# Altium PCB Float_Power_PCB.PcbDoc
Units mm, origin at the board's own origin, x right, y up, seen from the top; angles counter-clockwise.
Board outline 108 x 35 mm, 2 copper layers (Top Layer, Bottom Layer); 13 components, 15 nets, 58 pads, 3 vias.
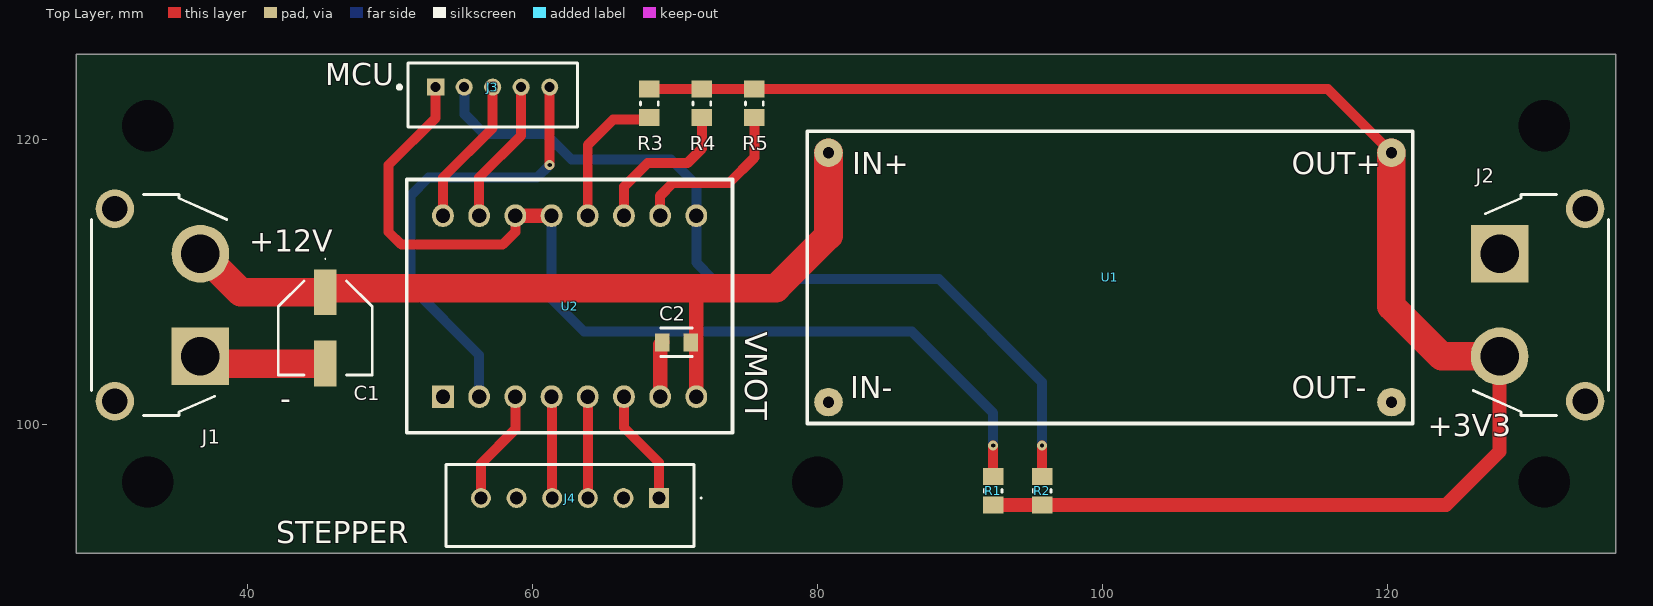
[diagram p0: Top Layer view]
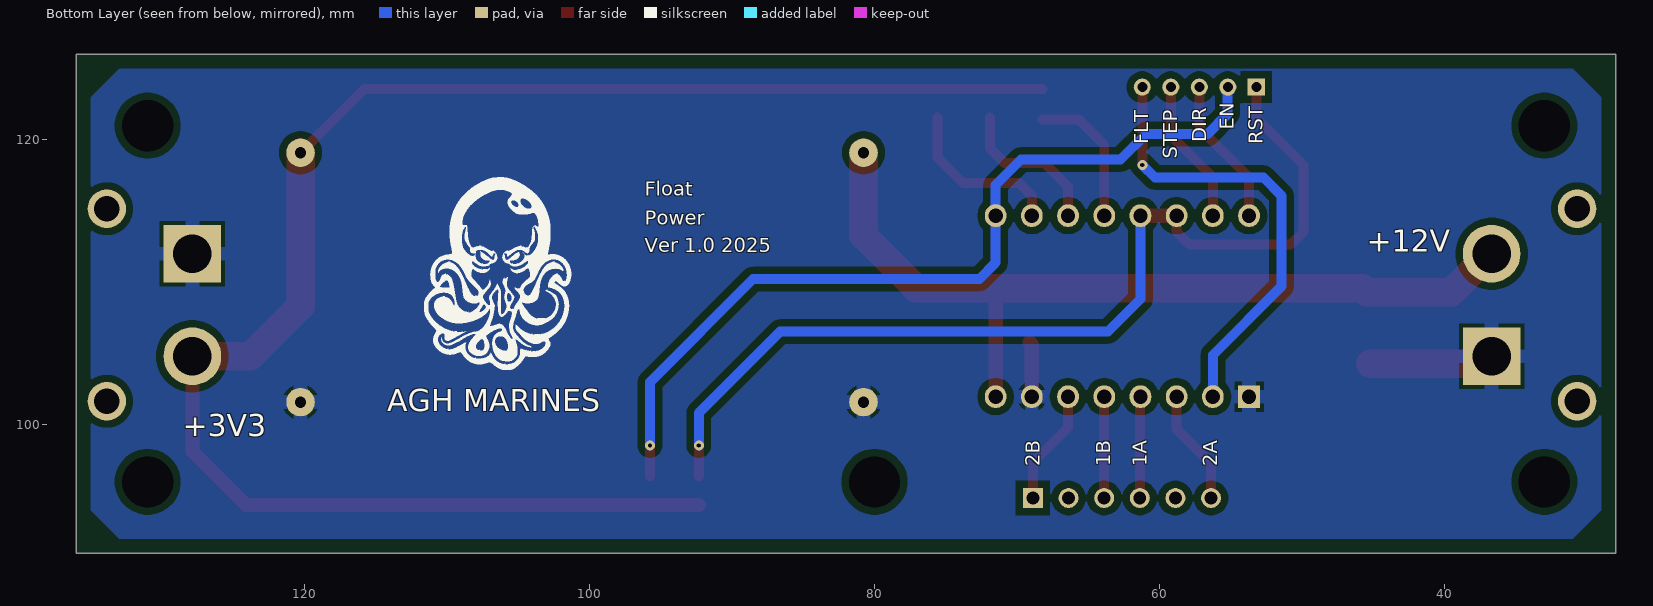
[diagram p1: Bottom Layer view, seen from below]
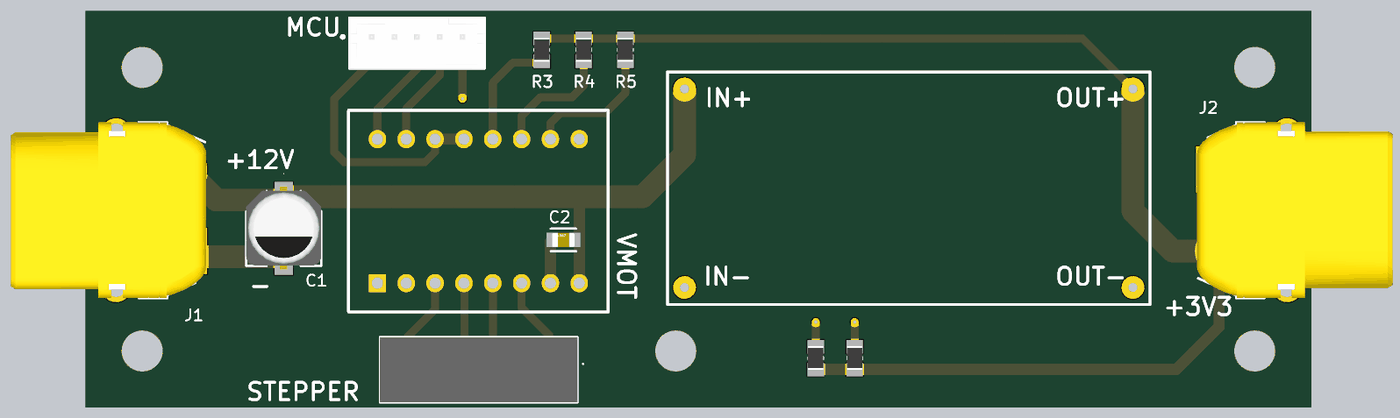
[diagram p2: 3D render of the assembled board from above, using the file's embedded part models]

## Layer stack, top to bottom
Top Solder: solder mask 0.0102, Solder Resist, Dk 3.5
Top Layer: signal copper 0.0356
Dielectric 1: dielectric 0.32, FR-4, Dk 4.8
Bottom Layer: signal copper 0.0356
Bottom Solder: solder mask 0.0102, Solder Resist, Dk 3.5

## Board outline
28,91 28,126 136,126 136,91

## Design rules (kind name [scope] priority, off if disabled: settings)
Clearance [All] p1: gap=0.5 ignorepadtopadclearanceinfootprint=TRUE
DiffPairsRouting [All] p1: maxlimit=0.254 minlimit=0.127 mostfreqgap=0.203 toplayer_minwidth=0.229 toplayer_maxwidth=0.381 toplayer_prefwidth=0.254 bottomlayer_minwidth=0.229 bottomlayer_maxwidth=0.381 bottomlayer_prefwidth=0.254 maxuncoupledlength=12.7
HoleSize [All] p1: absolutevalues=TRUE maxlimit=5 minlimit=0.025 maxpercent=80.000 minpercent=20.000
MinimumSolderMaskSliver [All] p1: minsoldermaskwidth=0.01
PlaneConnect [All] p1: planeconnectstyle=Relief reliefexpansion=0.508 reliefentries=4 reliefconductorwidth=0.5 reliefairgap=0.254
PolygonConnect [All] p1: thpad.connectstyle=Relief thpad.reliefconductorwidth=1 thpad.reliefentries=4 thpad.polygonreliefangle="90 Angle" thpad.airgapwidth=0.254 smdpad.connectstyle=Relief smdpad.reliefconductorwidth=0.3 smdpad.reliefentries=4 smdpad.polygonreliefangle="90 Angle" smdpad.airgapwidth=0.254 via.connectstyle=Relief via.reliefconductorwidth=0.3 via.reliefentries=4 via.polygonreliefangle="90 Angle" via.airgapwidth=0.254
RoutingVias [All] p1: holewidth=0.3 width=0.7 viastyle="Through Hole" minholewidth=0.25 minwidth=0.55 maxholewidth=0.4 maxwidth=0.9
SilkToSilkClearance [All] p1: silktosilkclearance=0.1
SilkToSolderMaskClearance [IsPad] p1: minsilkscreentomaskgap=0.1 clearancetoexposedcopper=TRUE
SolderMaskExpansion [All] p1: expansion=0.102 istentingtop=FALSE
SupplyNets "Schematic Supply Nets_3" [InNet('12V')] p1: voltage=0.000
SupplyNets "Schematic Supply Nets_2" [InNet('3V3')] p2: voltage=0.000
SupplyNets "Schematic Supply Nets_1" [InNet('GND')] p3: voltage=0.000
UnRoutedNet [All] p1: checkbadconnections=TRUE
Width [All] p1: maxlimit=3 minlimit=0.2 preferedwidth=0.5 minimp=50.000000 maximp=50.000000 favimp=50.000000
23 further rules are at their usual default settings.

## Components (designator, comment, footprint, x,y, rotation, side; value= is the part's Value field where it differs from the comment)
C1 "100uF" EEHZA1E101XP 45.466,106.807 r270 top
C2 "100nF" FP-0805-L_2_01_0_2-W_1_25-MFG 70.104,105.791 r180 top
J1 "XT60PW-F" XT60PWF 36.703,104.814 r90 top
J2 "XT60PW-F" XT60PWF 127.858,112.014 r270 top
J3 "B5B-PH-K-S(LF)(SN)" FP-B5B-PH-K-S_LF_SN-MFG 57.214,123.148 r0 top
J4 "B6B-XH-A" B6BXHA 68.888,94.869 r180 top
R1 "10k" RESC2013X60X35ML10T20 92.329,95.377 r270 top
R2 "10k" RESC2013X60X35ML10T20 95.758,95.377 r270 top
R3 "0" RESC2013X60X35ML10T20 68.199,122.555 r270 top
R4 "0" RESC2013X60X35ML10T20 71.882,122.555 r90 top
R5 "0" RESC2013X60X35ML10T20 75.565,122.555 r90 top
U1 "LM2596S" LM2596S 86.614,95.504 r0 top
U2 "DRV8825" DRV8825 71.501,101.981 r90 top

## Footprints (in the part's own frame and the unit in brackets; to place one, negate y for a bottom-side part, rotate by r counter-clockwise, add the part's x,y. Pads: shape width x height; smd on the part's side, far side on the other; paste and mask are expansions set on the pad)
B6BXHA [mm]
  rect 1.4x1.4 hole 0.9: 1(0,0)
  round 1.4 hole 0.9: 2(2.5,0) 3(5,0) 4(7.5,0) 5(10,0) 6(12.5,0)
  silkscreen extent -3,-2.35 14.95,3.4, body extent -2.45,-2.35 14.95,3.4, height 7.1
DRV8825 [mm] "DRV8825 stepper motor driver module"
  oval 1.6x1.524 hole 1 mask+0: 1A(0,10.16) 1B(0,7.62) 2A(0,12.7) 2B(0,5.08) DIR(12.7,17.78) EN(12.7,0) FLT(0,15.24) GND(0,2.54) M0(12.7,2.54) M1(12.7,5.08) M2(12.7,7.62) RST(12.7,10.16) SLEEP(12.7,12.7) STEP(12.7,15.24) VMOT(0,0)
  rect 1.6x1.524 hole 1 mask+0: GND(0,17.78)
  silkscreen extent -2.54,-2.54 15.24,20.32
EEHZA1E101XP [mm]
  rect 3.2x1.6 smd: 1(-2.5,0) 2(2.5,0)
  silkscreen extent -4.88,-3.3 3.3,3.3, body extent -3.68,-3.3 3.62,3.3, height 5.8
FP-0805-L_2_01_0_2-W_1_25-MFG [mm]
  rect 1x1.25 smd paste+0 mask+0: 1(-1,0) 2(1,0)
  silkscreen extent -1.1,-1 1.1,1, body extent -1.6,-0.82 1.6,0.82, height 0.25
FP-B5B-PH-K-S_LF_SN-MFG [mm]
  rect 1.2x1.2 hole 0.7 paste-2539.97 mask+0: 1(-4,0.55)
  round 1.2 hole 0.7 paste-2539.97 mask+0: 2(-2,0.55) 3(0,0.55) 4(2,0.55) 5(4,0.55)
  silkscreen extent -6.67,-2.25 5.95,2.25, body extent -6.05,-2.35 6.05,2.35, height 0.25
LM2596S [mm]
  round 2 hole 0.8: IN+(-5.842,23.596) IN-(-5.842,6.096) OUT+(33.658,23.596) OUT-(33.658,6.096)
  silkscreen extent -7.34,4.6 35.16,25.1
RESC2013X60X35ML10T20 [mm] "Chip Resistor, 2-Leads, Body 2.1x1.35mm, IPC Low Density"
  rect 1.2x1.45 smd: 1(-1,0) 2(1,0)
  silkscreen extent -0.1,-0.63 0.1,0.63, body extent -1.05,-0.68 1.05,0.67, height 0.6
XT60PWF [mm]
  rect 4.05x4.05 hole 2.7: 1(0,0)
  round 4.05 hole 2.7: 2(7.2,0)
  round 2.7 hole 1.8: 3(-3.15,6) 4(10.35,6)
  silkscreen extent -4.15,-1.85 11.35,7.65, body extent -4.15,-1.94 11.35,15.26, height 8.37

## Part data
C1: library part EEHZA1E101XP, "Capacitor Polarised", Manufacturer_Name=Panasonic, Arrow Part Number=EEHZA1E101XP, Arrow Price/Stock=https://www.arrow.com/en/products/eehza1e101xp/panasonic?utm_currency=USD&region=nac, Datasheet Link=http://industrial.panasonic.com/cdbs/www-data/pdf/RDD0000/ABA0000C1221.pdf, Height=8.3mm, Manufacturer_Part_Number=EEHZA1E101XP
C2: library part CMP-1036-04738-3, Capacitance=100n, Case Code (Imperial)=0805, Case Code (Metric)=2012, Dielectric=X7R, Insulation Resistance=100GR, Max Operating Temperature=125°C, Min Operating Temperature=-55°C, Package Quantity=1, Tolerance=10%, Voltage=10V, Case/Package=0805, Construction=Flat, Contact Plating=Tin, Depth=1.25mm, Dissipation Factor=5%, Height=1.4mm, Lead Free="Lead Free", Length=2.01mm, Mount="Surface Mount", Number of Pins=2, Packaging="Tape and Reel", Radiation Hardening=No, REACH SVHC="No SVHC", RoHS Compliant=Yes, Series=-, Size=1.4mm, Termination=SMD/SMT, Thickness=0.055inch, Voltage Rating=10V, Voltage Rating (DC)=10V, Width=1.25mm
J1 J2: "Connector", Manufacturer_Name=Amass, Datasheet Link=https://www.tme.eu/Document/1191bc2fa3aee3c446e5a895fd8f7983/XT60PW-F.pdf, Height=8.4mm, Manufacturer_Part_Number=XT60PW-F
J3: library part CMP-2000-05908-2, "CONN HEADER VERT 5POS 2MM", Color=Natural, Contact Resistance=20mR, Current Rating=2A, Flammability Rating="UL94 V-0", Housing Color=White, Insulation Resistance=1MR, Max Operating Temperature=85°C, Max Voltage Rating (AC)=100V, Min Operating Temperature=-25°C, Connector Type=Header, Contact Finish - Mating=TIN, Contact Material=Brass, Contact Mating Length=0.13inch, Contact Plating=Tin, Contact Shape=Square, Contact Type="Male Pin", Depth=4.5mm, Fastening Type=Detent, Gender=Male, Height=9.4mm, Housing Material=Polyamide, Insulation Color=Natural, Insulation Material=Nylon, Lead Free="Lead Free", Lead Pitch=2mm, Length=11.9mm, Mated Stacking Heights=8mm, Material=Polyamide, Max Current Rating=2A, Mount="Through Hole", Number of Contacts=5, Number of Pins=5, Number of Poles=5, Number of Positions=5, Number of Rows=1, Orientation=Straight, Packaging=Bulk, Pitch=2mm, REACH SVHC="No SVHC", Series=PH, Termination=Solder, Voltage Rating=100V, Voltage Rating (AC)=100V, Width=4.5mm, Working Voltage=100V
J4: "Connector", Manufacturer_Name="JST (JAPAN SOLDERLESS TERMINALS)", Datasheet Link=https://www.jst.com/wp-content/uploads/2021/01/eXH-new.pdf, Height=7mm, Manufacturer_Part_Number=B6B-XH-A
R1 R2 R3 R4 R5: library part CMP-2100-03671-1, Case Code (Imperial)=0805, Case Code (Metric)=2012, Manufacturer=Yageo, Max Operating Temperature=155degC, Max Power Dissipation=125mW, Min Operating Temperature=-55degC, Package Description="2-Pin Surface Mounted Device, Body 2 x 1.25 mm", Package Quantity=1, Resistance=1KOhm, Temperature Coefficient=100ppm/degreesC, Tolerance=1%, Voltage Rating=150V, Case/Package=0805, Composition=ThickFilm, Datasheet URL=http://www.yageo.com/NewPortal/yageodocoutput?fileName=/pdf/R-Chip/PYu-RC_Group_51_RoHS_L_5.pdf, Datasheet Version="Rev. 5, 10/2016", Depth=1.25mm, Height=0.024inch, Lead Free=LeadFree, Length=0.079inch, Manufacturer URL=http://www.yageo.com/, Military Standard=Not, Number of Pins=2, Number of Terminations=2, Package Reference=0805, Packaging=TapeandReel, Power Rating=125mW, REACH SVHC=Unknown, RoHSCompliant=true, Termination=SMD/SMT, Voltage Rating (DC)=150V, Width=0.049inch
U1: "LM2596S DC-DC Buck Converter: step-down voltage regulator, 3A max, 1.23–37V output"
U2: "DRV8825 stepper motor driver module"

## Free pads (board coordinates)
  round 1.524 hole 3.6: ""(33,96) ""(33,121) ""(80,96) ""(131,96) ""(131,121)

## Via types
v1: diameter 0.7, hole 0.3, Top Layer to Bottom Layer, 3 vias

## Nets (pads, with @x,y where several pads share a name; then routed paths per layer and width w, separated by ;. In a path a pad name is that pad's centre, name@x,y a point inside that pad or via, vN(x,y) a via of type N, cw(c..) or ccw(c..) an arc to the next point about the centre after c; other vN are vias at no path point)
3V3: J2.2 R1.2 R2.2 R3.1 R4.2 R5.2 U1.OUT+ | length 117.5
  Top Layer w0.7: R3.1 R4.2 R5.2 115.817,123.555 U1.OUT+
  Top Layer w1: R1.2 R2.2 124.095,94.377 127.858,98.14 J2.2 ; 120.256,113.141 120.272,113.157
  Top Layer w2: U1.OUT+ 120.272,113.157 120.272,108.328 123.786,104.814 J2.2
12V: C1.1 C2.1 J1.2 U1.IN+ U2.VMOT | length 60.5
  Top Layer w1: U2.VMOT 71.501,109.601 71.501,109.855
  Top Layer w2: J1.2@36.576,111.76 37.084,111.76 39.537,109.307 C1.1 45.76,109.601 71.501,109.601 77.089,109.601 80.772,113.284 U1.IN+
GND: C1.2 C2.2 J1.1 J2.1 U1.IN- U1.OUT- U2.GND | length 12.6
  Top Layer w1: U2.GND@68.961,101.981 68.961,105.648 C2.2
  Top Layer w2: J1.1 37.21,104.307 C1.2@45.212,104.307
M0: R5.1 U2.M0 | length 11.9
  Top Layer w0.7: U2.M0 68.961,116.078 69.85,116.967 73.787,116.967 75.565,118.745 R5.1
M1: R4.1 U2.M1 | length 10.8
  Top Layer w0.7: U2.M1 66.421,116.713 68.072,118.364 70.866,118.364 71.882,119.38 R4.1
M2: R3.2 U2.M2 | length 10
  Top Layer w0.7: U2.M2 63.881,119.634 65.659,121.412 R3.2@68.227,121.412
STEPPER_1A: J4.4 U2.1A | length 7.1
  Top Layer w0.381: J4.4@61.341,94.916 J4.4
  Top Layer w0.7: J4.4 U2.1A@61.388,101.934
STEPPER_1B: J4.3 U2.1B | length 7.1
  Top Layer w0.381: U2.1B U2.1B@63.888,101.974
  Top Layer w0.7: J4.3 U2.1B@63.888,101.974
STEPPER_2A: J4.6 U2.2A | length 8.1
  Top Layer w0.7: J4.6 56.388,97.282 58.801,99.695 U2.2A
STEPPER_2B: J4.1 U2.2B | length 8.1
  Top Layer w0.7: U2.2B 66.421,99.822 68.888,97.355 J4.1
STEPPER_DIR: J3.3 U2.DIR | length 10.5
  Top Layer w0.7: U2.DIR 53.721,117.348 57.214,120.841 J3.3
STEPPER_EN: J3.2 R2.1 U2.EN | length 60
  Top Layer w0.7: R2.1 v1(95.758,98.552)
  Bottom Layer w0.7: J3.2 55.245,123.667 55.245,121.793 56.642,120.396 60.96,120.396 62.738,118.618 69.723,118.618 71.501,116.84 U2.EN 71.501,111.379 72.644,110.236 88.519,110.236 95.758,102.997 v1(95.758,98.552)
STEPPER_FLT: J3.5 U2.FLT | length 32.2
  Top Layer w0.7: v1(61.214,118.237) J3.5
  Bottom Layer w0.7: U2.FLT 56.261,104.902 51.435,109.728 51.435,116.078 52.705,117.348 60.325,117.348 v1(61.214,118.237)
STEPPER_RST: J3.1 R1.1 U2.RST U2.SLEEP | length 69.4
  Top Layer w0.7: J3.1 53.214,121.54 49.911,118.237 49.911,113.538 50.8,112.649 57.912,112.649 58.801,113.538 U2.SLEEP ; R1.1 v1(92.329,98.552)
  Top Layer w1: U2.SLEEP U2.RST
  Bottom Layer w0.7: U2.RST 61.341,108.839 63.627,106.553 86.614,106.553 92.329,100.838 v1(92.329,98.552)
STEPPER_STEP: J3.4 U2.STEP | length 10.2
  Top Layer w0.7: U2.STEP 56.261,117.348 59.214,120.301 J3.4
pads on no net: J1.3 J1.4 J2.3 J2.4 J4.2 J4.5

## Polygon pours and split planes (outlines as drawn)
GND on Bottom Layer "GND_L02_P000" (solid, pour order 0): 29,123 31,125 133,125 135,123 135,94 133,92 31,92 29,94

## Silkscreen, mask and mechanical layers (free items; w line width, h text height)
Top Overlay:
  text "MCU" at 45.466,123.825 h1.52
  text "+12V" at 40.132,112.141 h1.52
  text "-" at 42.291,101.092 h1.52
  text "+3V3" at 122.809,99.187 h1.52
  text "STEPPER" at 42.037,91.694 h1.52
Bottom Overlay:
  region: 4491 vertices and 14 holes, not listed, extent 101.29,103.853 111.596,117.367
  text "EN" at 54.81,120.723 h1 r270
  text "DIR" at 56.715,119.834 h1 r270
  text "RST" at 52.778,119.707 h1 r270
  text "FLT" at 60.779,119.707 h1 r270
  text "STEP" at 58.747,118.691 h1 r270
  text "Float" at 96.103,116.063 h1
  text "Power" at 96.103,114.031 h1
  text "+12V" at 45.466,112.141 h1.52
  text "Ver 1.0 2025" at 96.103,112.126 h1
  text "AGH MARINES" at 114.17,100.965 h1.52
  text "+3V3" at 128.524,99.187 h1.52
  text "2A" at 55.953,97.101 h1 r270
  text "1A" at 60.906,97.101 h1 r270
  text "1B" at 63.446,97.101 h1 r270
  text "2B" at 68.399,97.101 h1 r270
Mechanical 1:
  the board outline again, w0.254

## Text inside footprints (layer, text, board x,y; h text height)
U1: Top Overlay "IN+" at 82.423,117.602 h1.52; Top Overlay "IN-" at 82.296,101.854 h1.52; Top Overlay "OUT-" at 113.284,101.854 h1.52; Top Overlay "OUT+" at 113.284,117.602 h1.52
U2: Top Overlay "VMOT" at 74.93,106.553 h1.52 r270